# Altium PCB Sandshark 3D R1.2.PcbDoc (part 1 of 3)
Units mil, origin at the board's own origin, x right, y up, seen from the top; angles counter-clockwise.
Board outline 4143.89 x 2810.03 mil, 5 copper layers (Top Layer, Mid-Layer 1, Groun Plane, Power Plane, Bottom Layer), stack 75.73 mil thick; 280 components, 177 nets, 885 pads, 474 vias.
Unrouted connection lines stored in the file: 15.
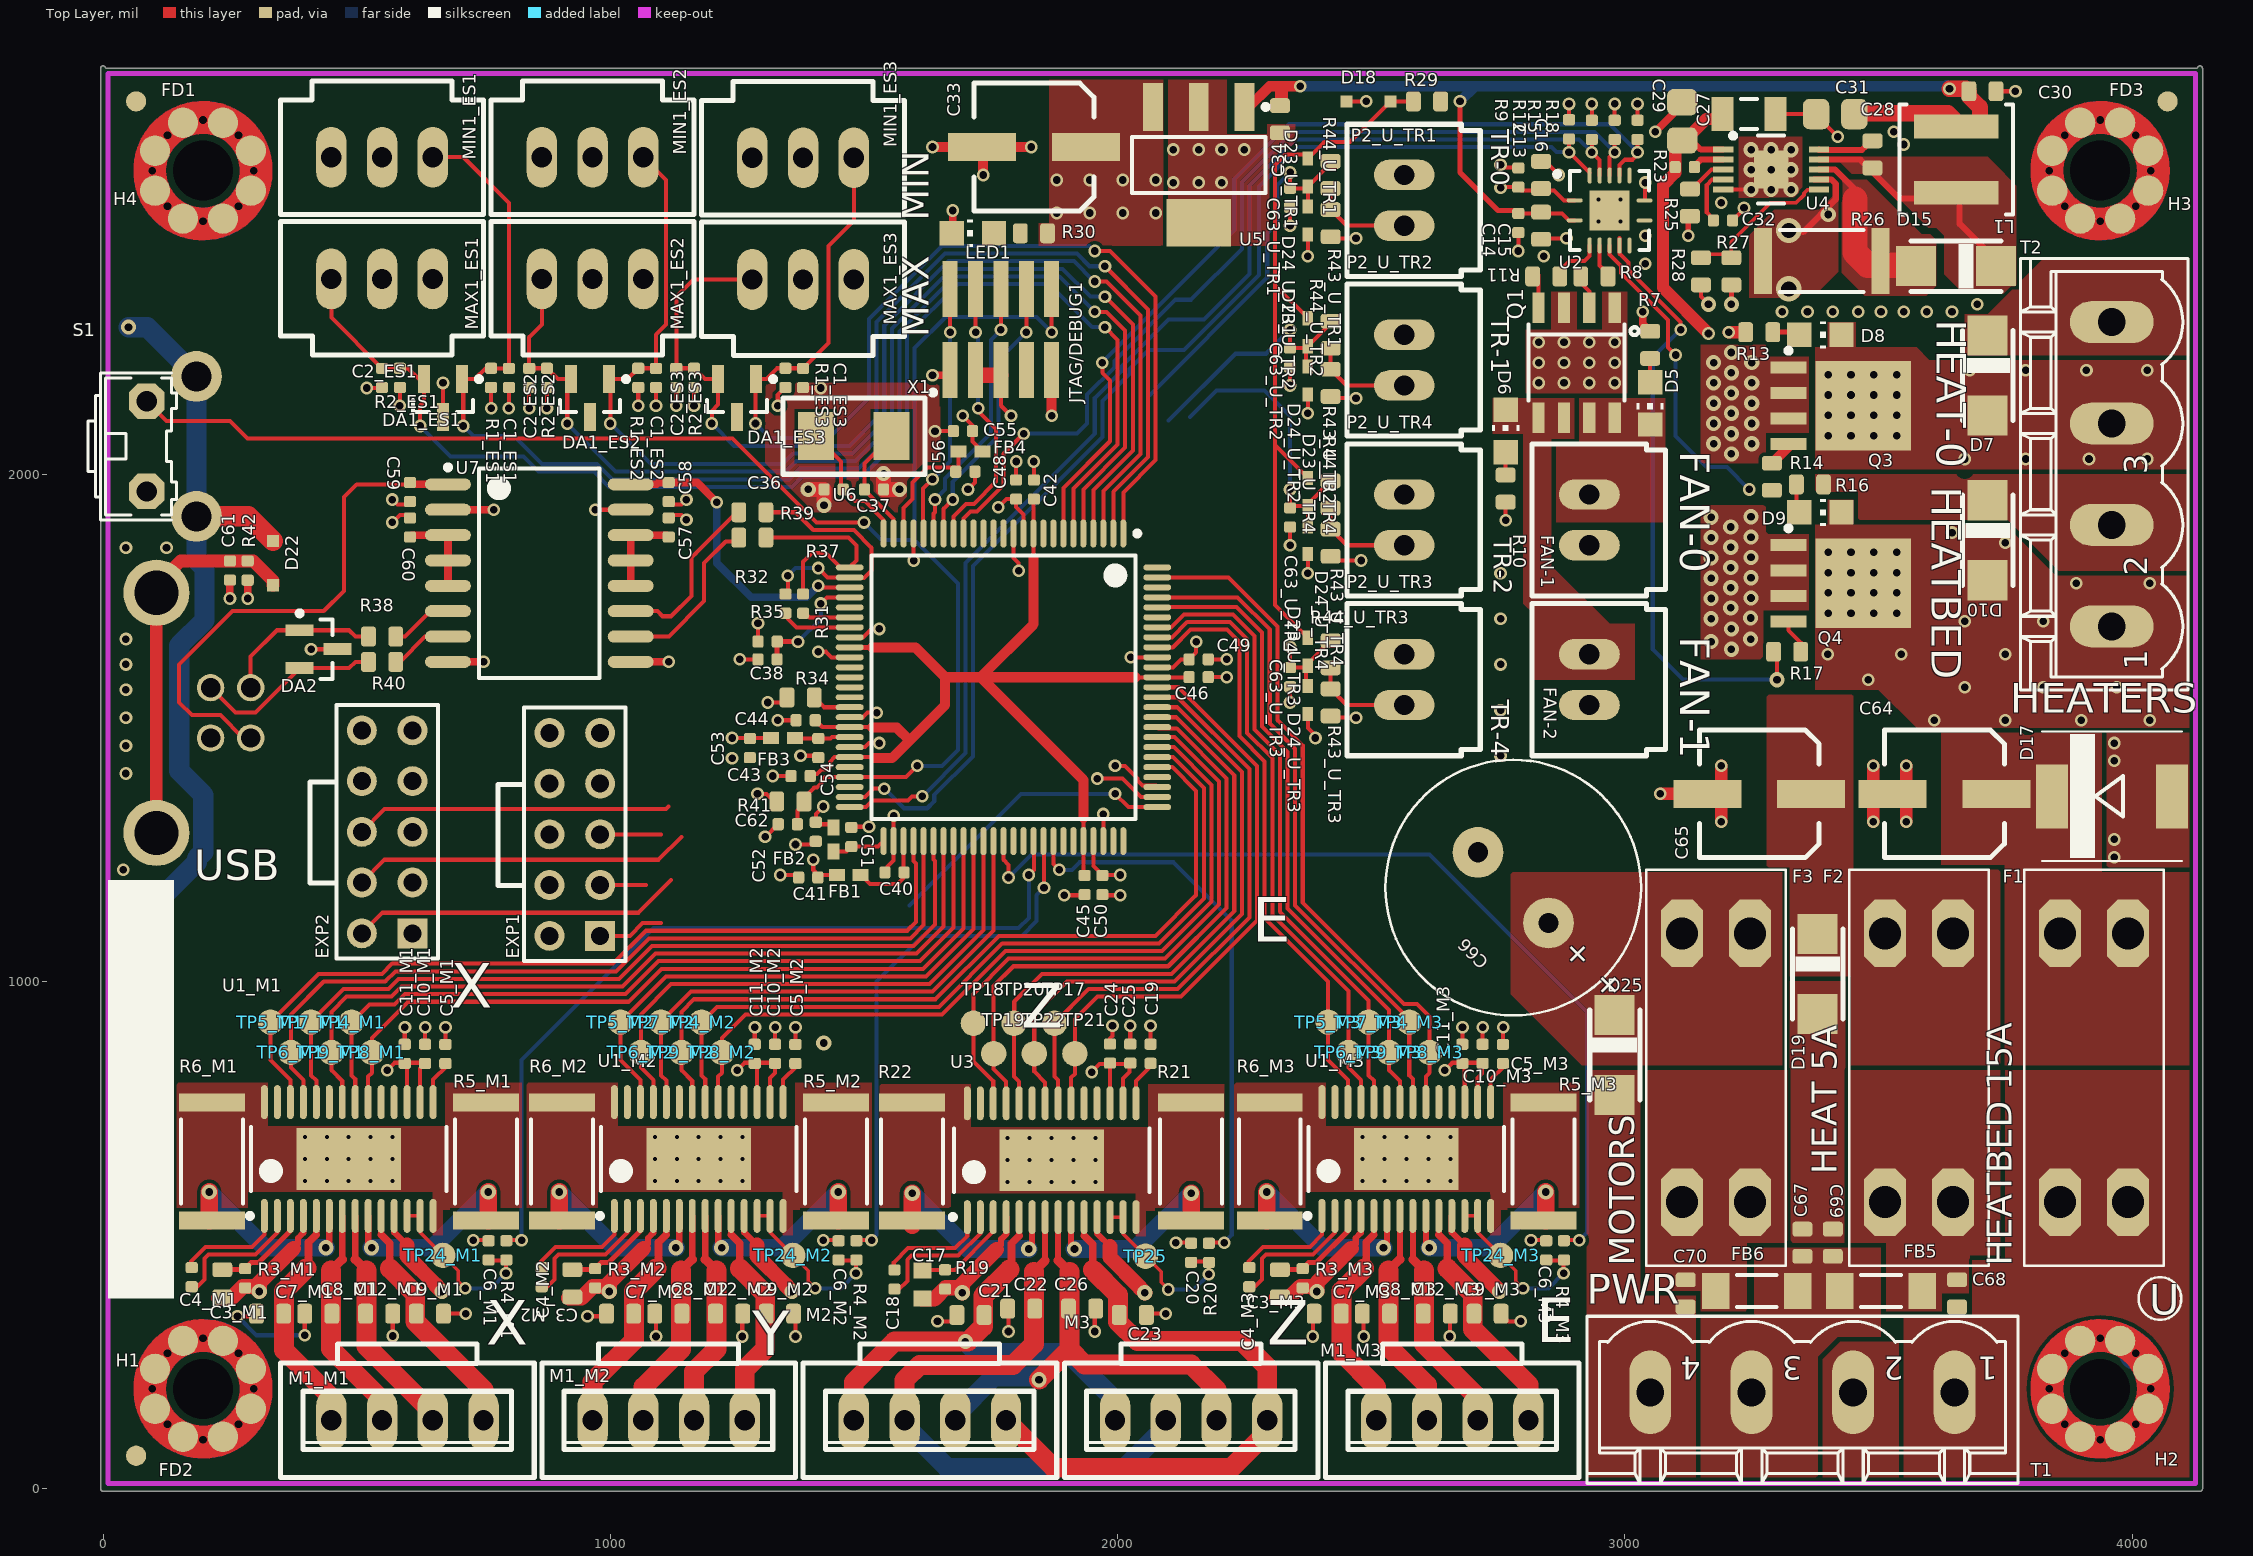
[diagram p0: Top Layer view]
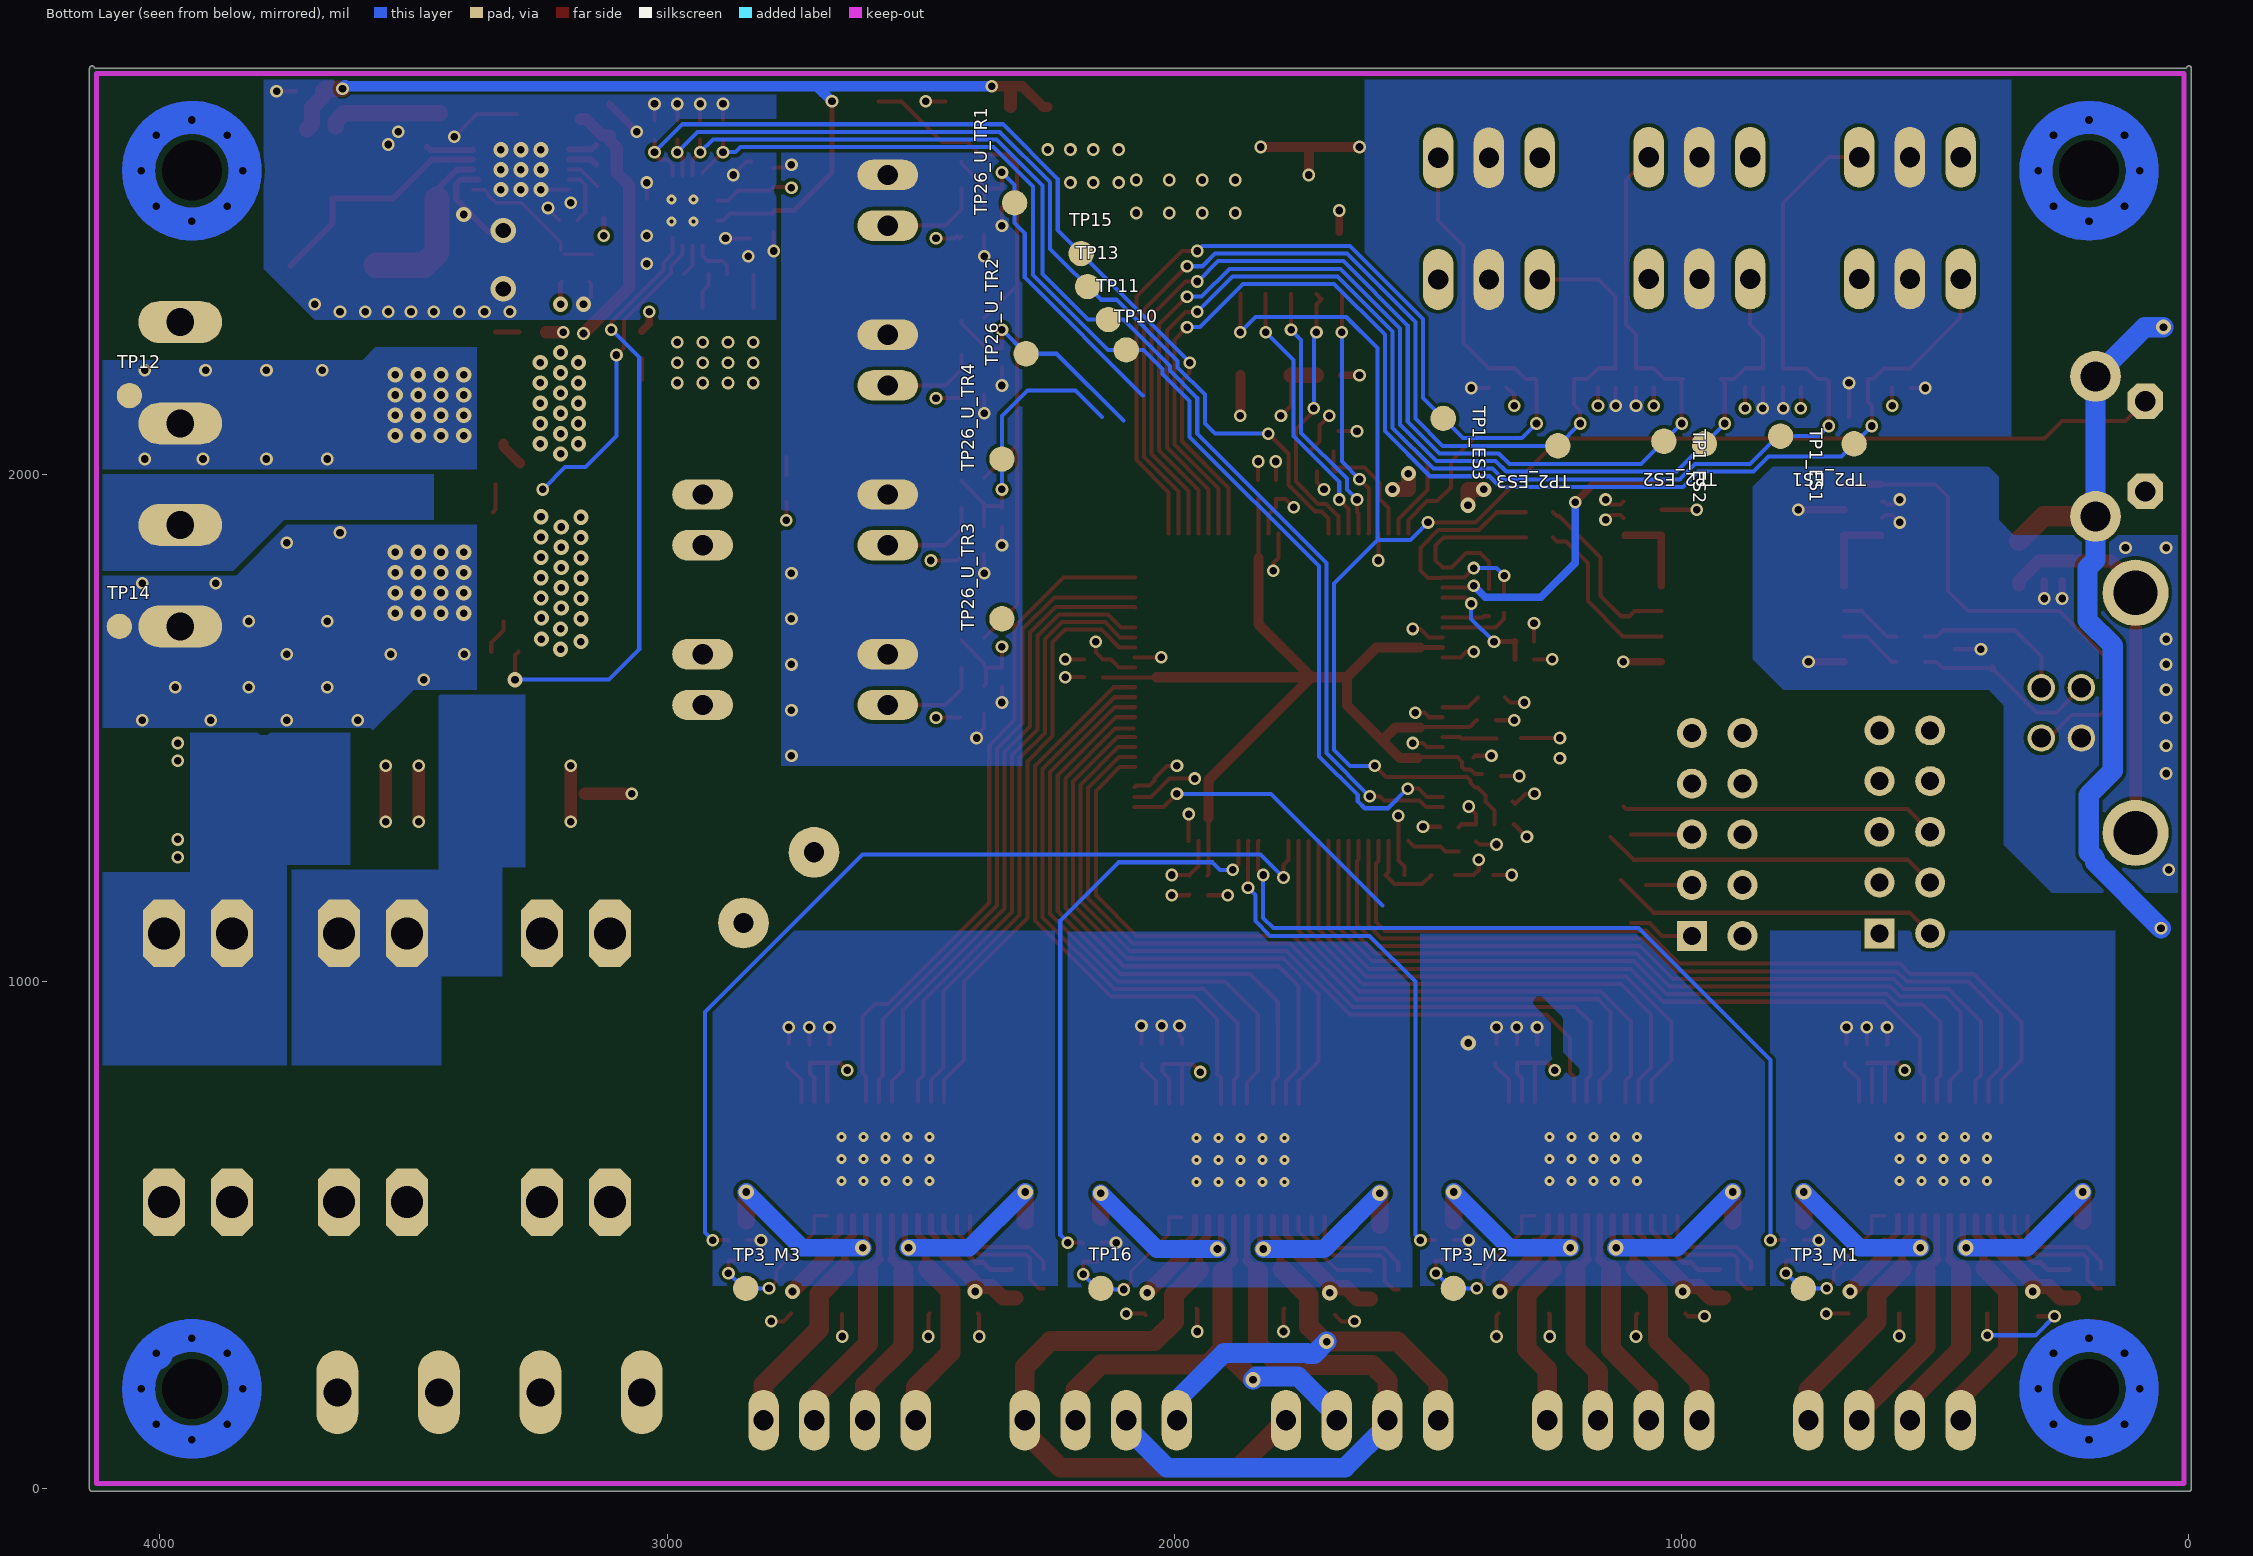
[diagram p1: Bottom Layer view, seen from below]
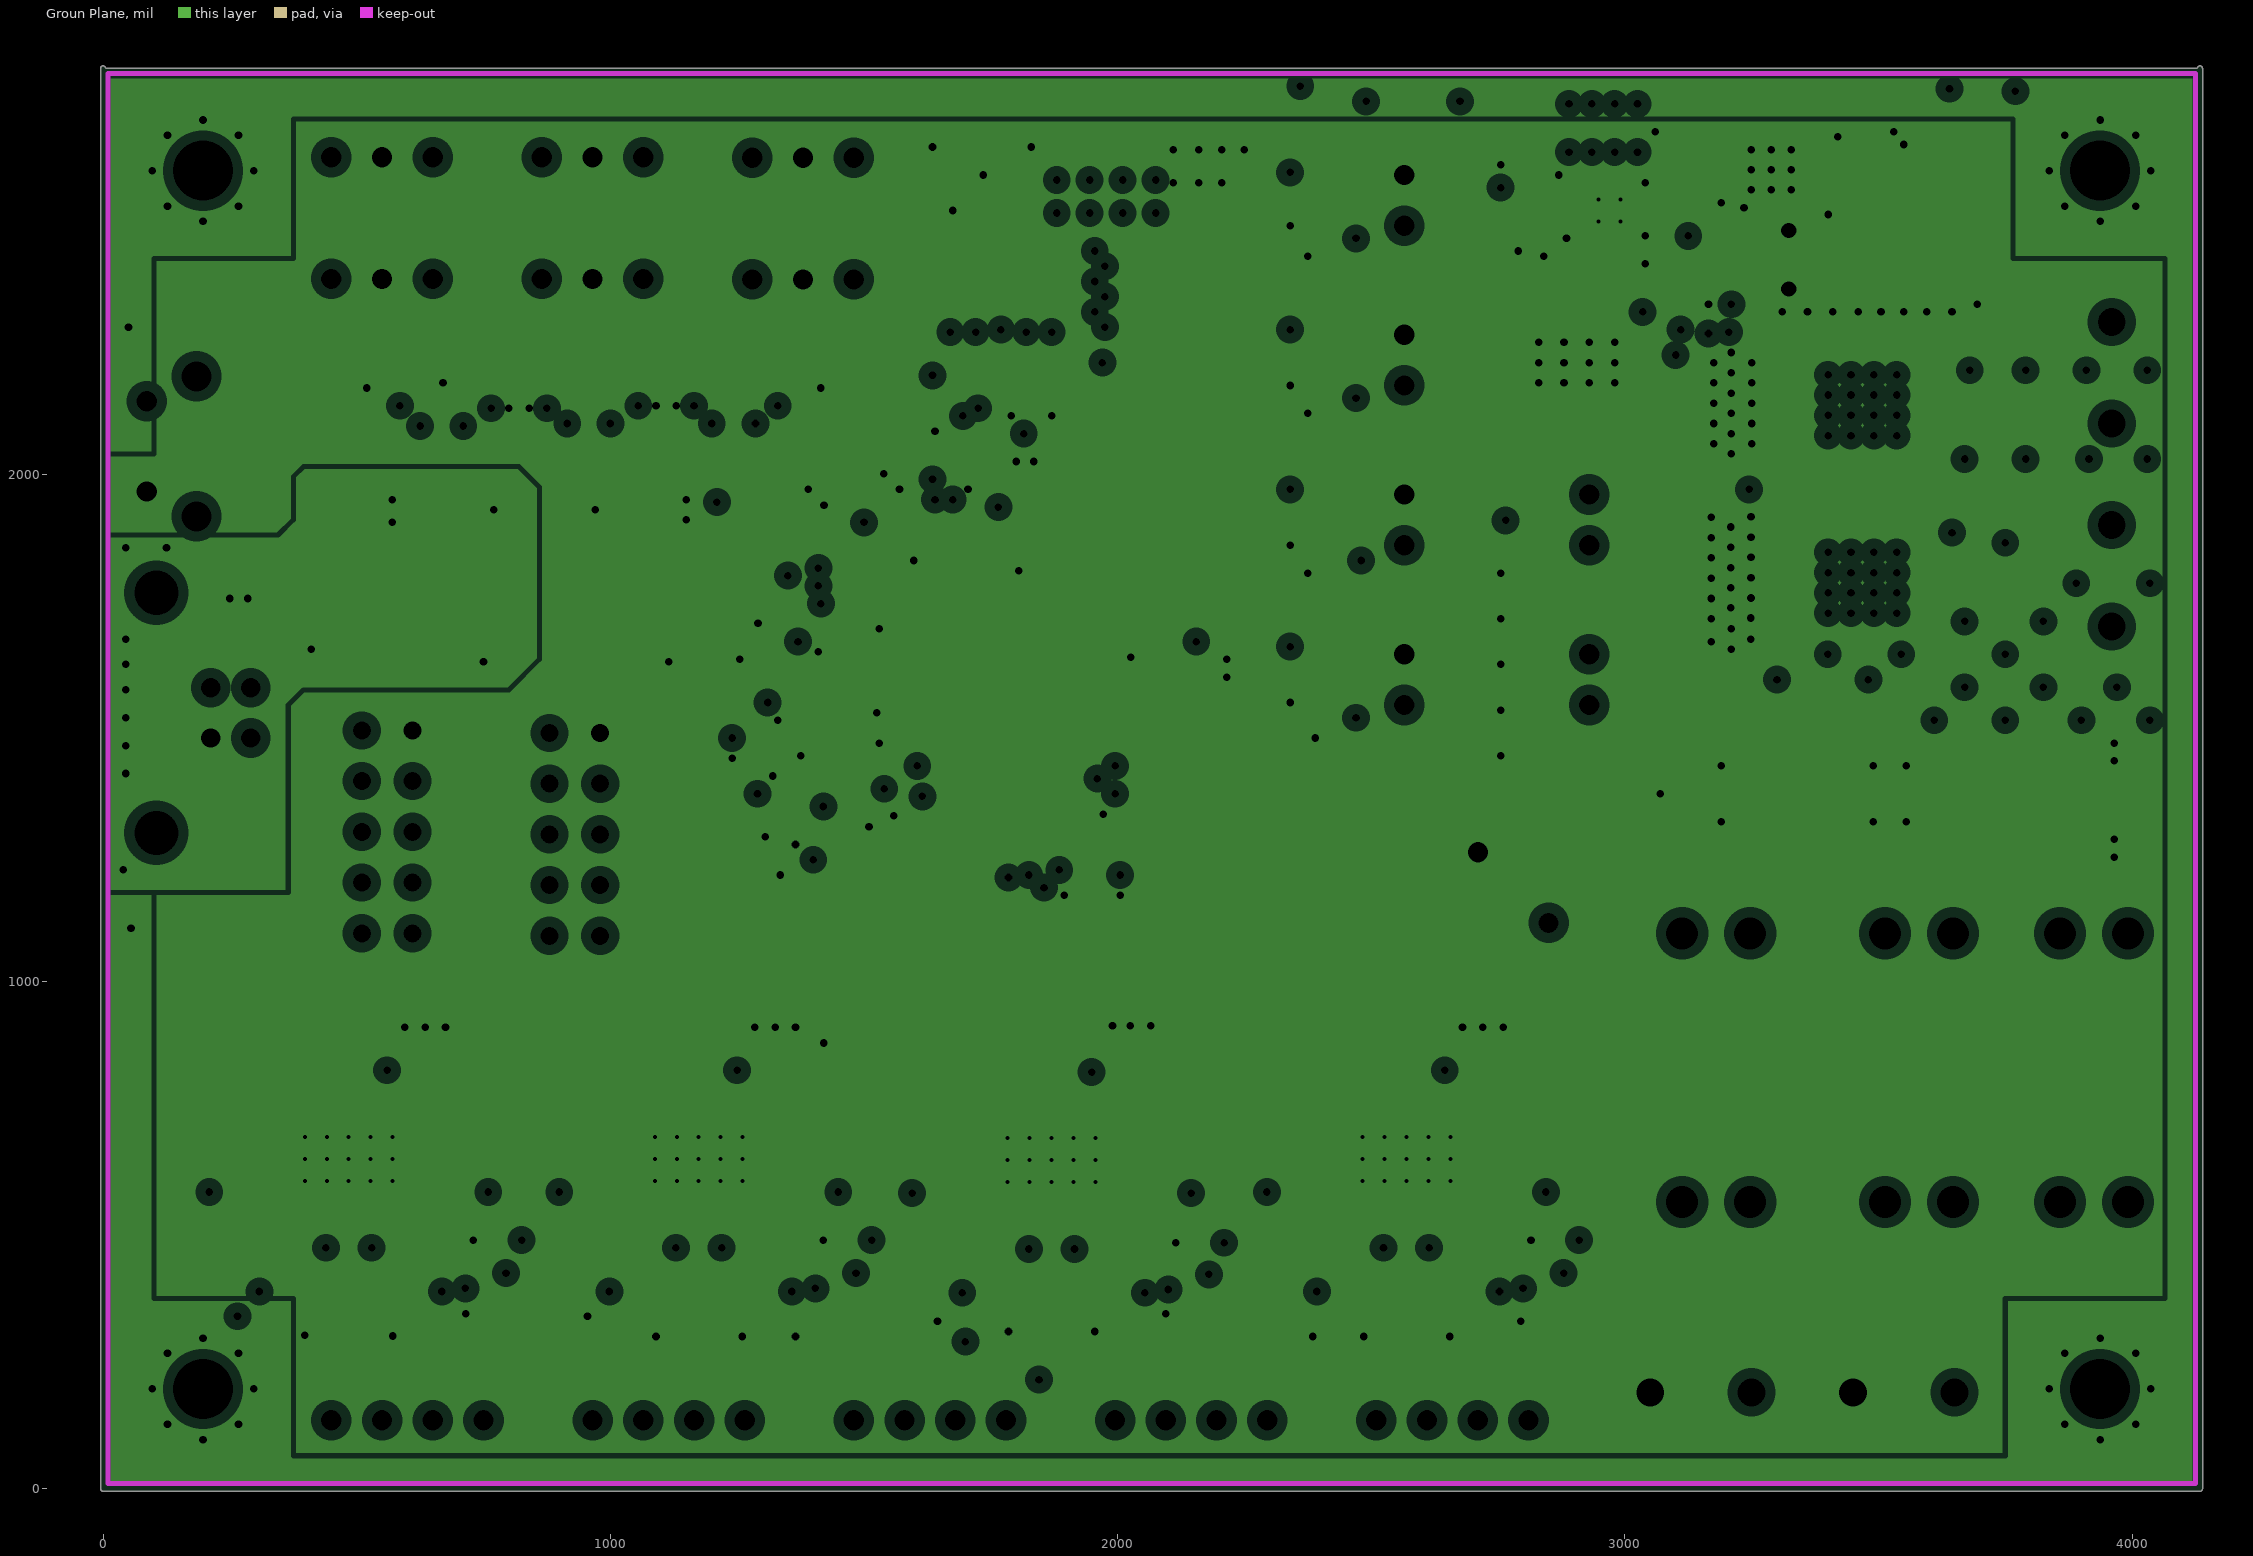
[diagram p2: Groun Plane, clearances drawn from the general rule]
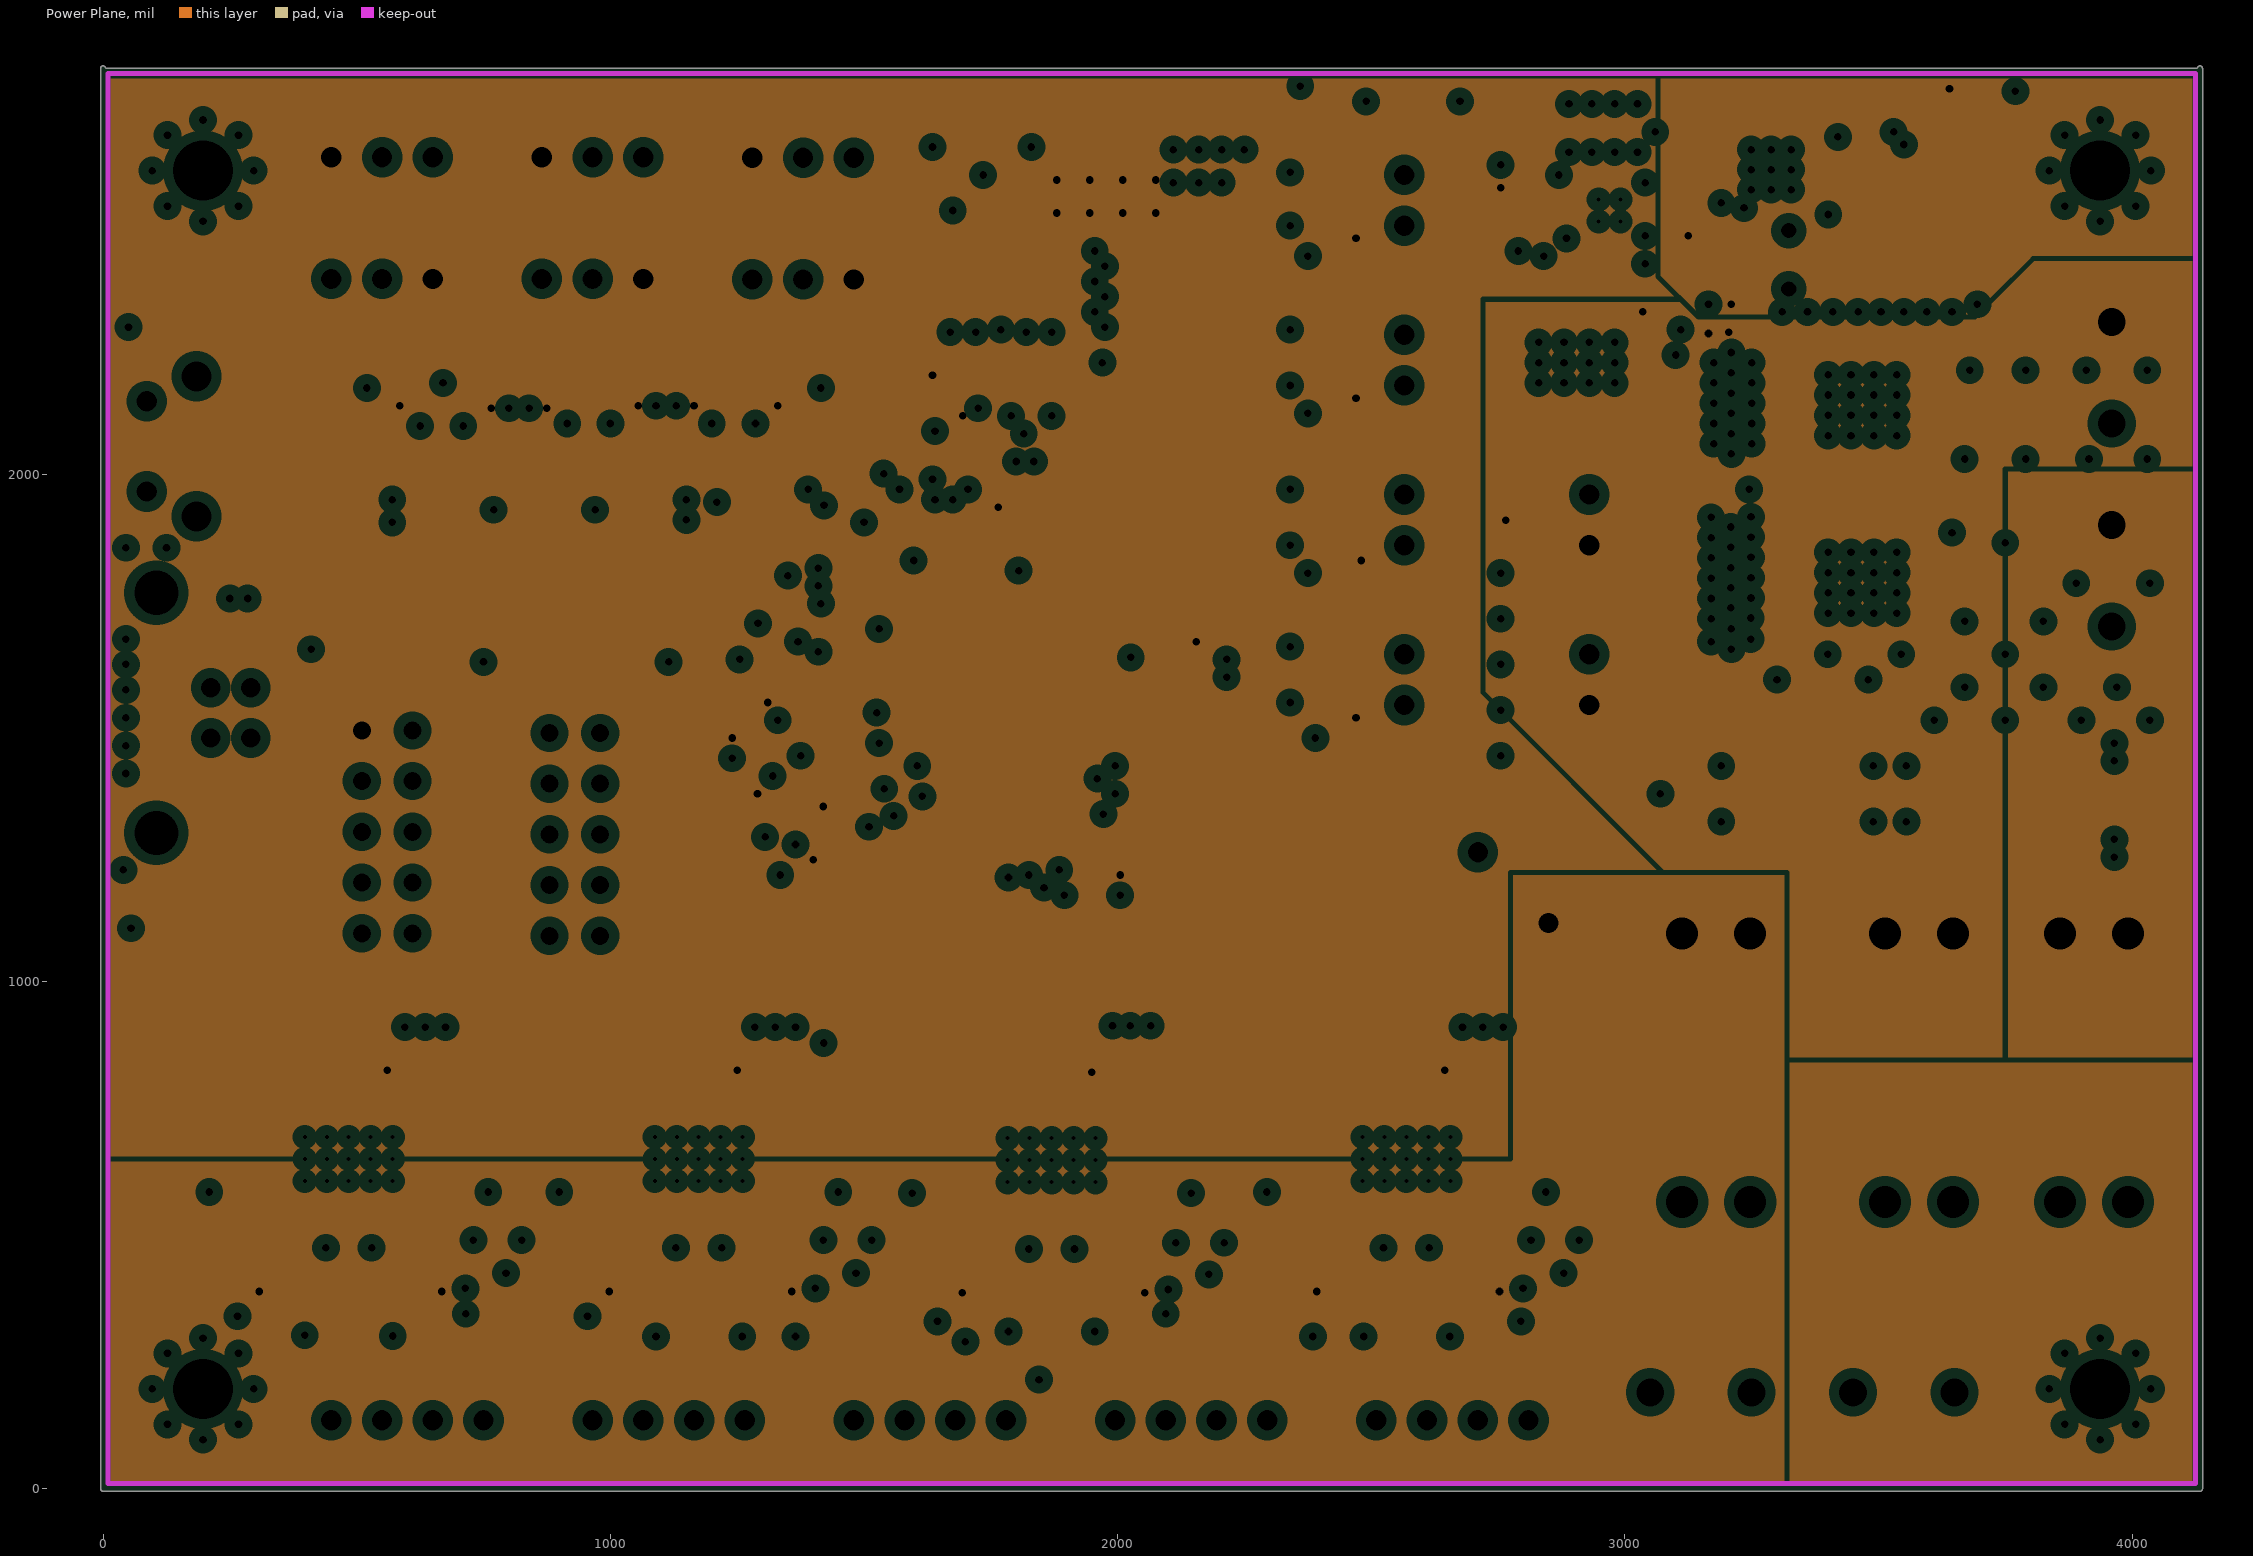
[diagram p3: Power Plane, clearances drawn from the general rule]

## Layer stack, top to bottom
Top Solder: solder mask 0.4, Solder Resist, Dk 3.5
Top Layer: signal copper 2.75
Dielectric1: prepreg 21.654, FR-4, Dk 4.2
Mid-Layer 1: signal copper 1.4
Dielectric4: dielectric 12.6, FR-4, Dk 4.8
Groun Plane: plane copper 1.4, net (Multiple Nets)
Dielectric2: core 10.236, FR-4, Dk 4.2
Power Plane: plane copper 1.4, net (Multiple Nets)
Dielectric3: prepreg 21.54, FR-4, Dk 4.2
Bottom Layer: signal copper 2.75
Bottom Solder: solder mask 0.4, Solder Resist, Dk 3.5

## Board outline
0,-5.01 cw(c0,0) -5.01,0 -5.01,2800 cw(c0,2800) 5.01,2800.29 4128.85,2800.29 cw(c4133.86,2800) 4138.87,2800 4138.87,0 cw(c4133.86,0) 4133.86,-5.01

## Design rules (kind name [scope] priority, off if disabled: settings)
Clearance [All] p1: gap=7
ComponentClearance [All] p1: gap=0 collisioncheckmode=3 verticalgap=10 showdistances=FALSE
DiffPairsRouting [All] p1: maxlimit=10 minlimit=10 mostfreqgap=10 toplayer_minwidth=15 toplayer_maxwidth=15 toplayer_prefwidth=15 midlayer1_minwidth=15 midlayer1_maxwidth=15 midlayer1_prefwidth=15 bottomlayer_minwidth=15 bottomlayer_maxwidth=15 bottomlayer_prefwidth=15 maxuncoupledlength=500
FanoutControl Fanout_SOIC [(InComponent('U8') AND InComponent('U7'))] p3: bgadir=Out bgaviamode=Centered fanoutstyle=Staggered fanoutdirection=Alternating viagrid=1 // Fanout_SOIC (Default Rule)
FanoutControl Fanout_Small [All] p4: bgadir=Out bgaviamode=Centered fanoutstyle=Auto fanoutdirection=Alternating viagrid=1 // Fanout_Small (Default Rule)
HoleSize [All] p1: absolutevalues=TRUE maxlimit=200 minlimit=15 maxpercent=80.000 minpercent=20.000
MinimumSolderMaskSliver [All] p1 off: minsoldermaskwidth=10
PlaneClearance [All] p1: clearance=20
PlaneConnect [All] p1: planeconnectstyle=Direct reliefexpansion=20 reliefentries=4 reliefconductorwidth=10 reliefairgap=10
PolygonConnect [All] p1: connectstyle=Direct reliefconductorwidth=45 reliefentries=4 polygonreliefangle="90 Angle" airgapwidth=10
RoutingLayers [All] p1: top layer_v5=TRUE mid layer 1_v5=FALSE bottom layer_v5=TRUE
RoutingVias [All] p1: holewidth=15 width=25 viastyle="Through Hole" minholewidth=15 minwidth=25 maxholewidth=28 maxwidth=50
SilkToSilkClearance [All] p1 off: silktosilkclearance=10
SilkToSolderMaskClearance SilkscreenOverComponentPads [IsPad] p1 off: minsilkscreentomaskgap=10 clearancetoexposedcopper=TRUE
SolderMaskExpansion [All] p1: expansion=4
UnpouredPolygon [All] p1: allowunpoured=FALSE
Width [All] p1: maxlimit=200 minlimit=7 preferedwidth=8 midlayer1_maxwidth=50 minimp=50.000000 maximp=50.000000 favimp=50.000000
18 further rules are at their usual default settings.

## Classes and differential pairs
component class ES1: C1_ES1 C2_ES1 DA1_ES1 MAX1_ES1 MIN1_ES1 R1_ES1 R2_ES1 TP1_ES1 TP2_ES1
component class ES2: C1_ES2 C2_ES2 DA1_ES2 MAX1_ES2 MIN1_ES2 R1_ES2 R2_ES2 TP1_ES2 TP2_ES2
component class ES3: C1_ES3 C2_ES3 DA1_ES3 MAX1_ES3 MIN1_ES3 R1_ES3 R2_ES3 TP1_ES3 TP2_ES3
component class M1: C3_M1 C4_M1 C5_M1 C6_M1 C7_M1 C8_M1 C9_M1 C10_M1 C11_M1 C12_M1 M1_M1 R3_M1 R4_M1 R5_M1 R6_M1 TP3_M1 TP4_M1 TP5_M1 TP6_M1 TP7_M1 TP8_M1 TP9_M1 TP24_M1 U1_M1
component class M2: C3_M2 C4_M2 C5_M2 C6_M2 C7_M2 C8_M2 C9_M2 C10_M2 C11_M2 C12_M2 M1_M2 R3_M2 R4_M2 R5_M2 R6_M2 TP3_M2 TP4_M2 TP5_M2 TP6_M2 TP7_M2 TP8_M2 TP9_M2 TP24_M2 U1_M2
component class M3: C3_M3 C4_M3 C5_M3 C6_M3 C7_M3 C8_M3 C9_M3 C10_M3 C11_M3 C12_M3 M1_M3 R3_M3 R4_M3 R5_M3 R6_M3 TP3_M3 TP4_M3 TP5_M3 TP6_M3 TP7_M3 TP8_M3 TP9_M3 TP24_M3 U1_M3
component class "Sandshark 3D - MCU - ATSAM3X8C": C36 C37 C38 C40 C41 C42 C43 C44 C45 C46 C48 C49 C50 C51 C52 C53 C54 C55 C56 C57 C58 C59 C60 C61 C62 D22 DA2 EXP1 EXP2 FB1 FB2 FB3 FB4 FD1 FD2 FD3 JTAG/DEBUG1 R31 R32 R34 R35 R37 R38 R39 R40 R41 R42 S1 U6 U7 USB X1
component class "U_MOSFETs and Driver": C13 C14 C15 C16 D5 D6 D7 D8 D9 D10 FAN-1 FAN-2 Q1 Q3 Q4 R7 R8 R9 R10 R11 R12 R13 R14 R15 R16 R17 R18 T2 TP10 TP11 TP12 TP13 TP14 TP15 U2
component class U_MZ: C17 C18 C19 C20 C21 C22 C23 C24 C25 C26 M2 M3 R19 R20 R21 R22 TP16 TP17 TP18 TP19 TP20 TP21 TP22 TP25 U3
component class U_Pwr: C27 C28 C29 C30 C31 C32 C33 C34 C64 C65 C66 C67 C68 C69 C70 D15 D17 D18 D19 D25 F1 F2 F3 FB5 FB6 H1 H2 H3 H4 L1 LED1 R23 R25 R26 R27 R28 R29 R30 T1 U4 U5
net class DIR_BUS[1..3]: DIR_BUS1 DIR_BUS2 DIR_BUS3
net class DRV_RESET_BUS[1..3]: DRV_RESET_BUS1 DRV_RESET_BUS2 DRV_RESET_BUS3
net class EN_BUS[1..3]: EN_BUS1 EN_BUS2 EN_BUS3
net class MAX_ES_BUS[1..3]: MAX_ES_BUS1 MAX_ES_BUS2 MAX_ES_BUS3
net class MIN_ES_BUS[1..3]: MIN_ES_BUS1 MIN_ES_BUS2 MIN_ES_BUS3
net class MOD0E_BUS[1..3]: MOD0E_BUS1 MOD0E_BUS2 MOD0E_BUS3
net class MOD1E_BUS[1..3]: MOD1E_BUS1 MOD1E_BUS2 MOD1E_BUS3
net class MOD2E_BUS[1..3]: MOD2E_BUS1 MOD2E_BUS2 MOD2E_BUS3
net class REF_BUS[1..3]: REF_BUS1 REF_BUS2 REF_BUS3
net class STEP_BUS[1..3]: STEP_BUS1 STEP_BUS2 STEP_BUS3
channel class ES: ES1 ES2 ES3
channel class M: M1 M2 M3
component class U_TR1: C63_U_TR1 D23_U_TR1 D24_U_TR1 P2_U_TR1 R43_U_TR1 R44_U_TR1 TP26_U_TR1
component class U_TR2: C63_U_TR2 D23_U_TR2 D24_U_TR2 P2_U_TR2 R43_U_TR2 R44_U_TR2 TP26_U_TR2
component class U_TR3: C63_U_TR3 D23_U_TR3 D24_U_TR3 P2_U_TR3 R43_U_TR3 R44_U_TR3 TP26_U_TR3
component class U_TR4: C63_U_TR4 D23_U_TR4 D24_U_TR4 P2_U_TR4 R43_U_TR4 R44_U_TR4 TP26_U_TR4
net class AN_BUS[1..4]: AN_BUS1 AN_BUS2 AN_BUS3 AN_BUS4
channel class TR: U_TR1 U_TR2 U_TR3 U_TR4
differential pair R: +R_P -R_N
differential pair UD: +UD_P -UD_N
differential pair UI: +UI_P -UI_N
differential pair UMCU: +UMCU_P -UMCU_N

## Components (designator, comment, footprint, x,y, rotation, side; value= is the part's Value field where it differs from the comment)
C1_ES1 "0402" C0402 800,2190 r270 top (schematic designator C1)
C1_ES2 "0402" C0402 1090,2190 r270 top (schematic designator C1)
C1_ES3 "0402" C0402 1380,2190 r270 top (schematic designator C1)
C2_ES1 "0402" C0402 550,2190 r270 top (schematic designator C2)
C2_ES2 "0402" C0402 840,2190 r270 top (schematic designator C2)
C2_ES3 "0402" C0402 1130,2190 r270 top (schematic designator C2)
C3_M1 "100nF" C0603 235,405 r270 top (schematic designator C3)
C3_M2 "100nF" C0603 925,405 r270 top (schematic designator C3)
C3_M3 "100nF" C0603 2320,405 r270 top (schematic designator C3)
C4_M1 "0402" C0402 174.69,417.2 r270 top (schematic designator C4)
C4_M2 "0402" C0402 864.69,417.2 r270 top (schematic designator C4)
C4_M3 "0402" C0402 2259.69,417.2 r270 top (schematic designator C4)
C5_M1 "0402" C0402 674.69,857.2 r270 top (schematic designator C5)
C5_M2 "0402" C0402 1364.69,857.2 r270 top (schematic designator C5)
C5_M3 "0402" C0402 2759.69,857.2 r270 top (schematic designator C5)
C6_M1 "100nF" C0402 760,470 r270 top (schematic designator C6)
C6_M2 "100nF" C0402 1450,470 r270 top (schematic designator C6)
C6_M3 "100nF" C0402 2845,470 r270 top (schematic designator C6)
C7_M1 "10uF" C0603 329.25,345 r180 top (schematic designator C7)
C7_M2 "10uF" C0603 1019.25,345 r180 top (schematic designator C7)
C7_M3 "10uF" C0603 2414.25,345 r180 top (schematic designator C7)
C8_M1 "10uF" C0603 424.25,345 r180 top (schematic designator C8)
C8_M2 "10uF" C0603 1114.25,345 r180 top (schematic designator C8)
C8_M3 "10uF" C0603 2509.25,345 r180 top (schematic designator C8)
C9_M1 "10uF" C0603 644.25,345 r0 top (schematic designator C9)
C9_M2 "10uF" C0603 1334.25,345 r0 top (schematic designator C9)
C9_M3 "10uF" C0603 2729.25,345 r0 top (schematic designator C9)
C10_M1 "100nF" C0402 634.69,857.2 r90 top (schematic designator C10)
C10_M2 "100nF" C0402 1324.69,857.2 r90 top (schematic designator C10)
C10_M3 "100nF" C0402 2719.69,857.2 r90 top (schematic designator C10)
C11_M1 "100nF" C0402 594.69,857.2 r90 top (schematic designator C11)
C11_M2 "100nF" C0402 1284.69,857.2 r90 top (schematic designator C11)
C11_M3 "100nF" C0402 2679.69,857.2 r90 top (schematic designator C11)
C12_M1 "10uF" C0603 544.25,345 r0 top (schematic designator C12)
C12_M2 "10uF" C0603 1234.25,345 r0 top (schematic designator C12)
C12_M3 "10uF" C0603 2629.25,345 r0 top (schematic designator C12)
C13 "0402" C0402 2790,2585 r270 top
C14 "0402" C0402 2790,2495 r90 top
C15 "0603" C0603 2835,2490 r90 top
C16 "0603" C0603 2835,2590 r270 top
C17 "0603" 1608[0603] 1615,402.64 r90 top
C18 "0402" C0402 1560,412.64 r270 top
C19 "0402" C0402 2065,857.64 r270 top
C20 "100nF" C0402 2145,465 r90 top
C21 "10uF" C0603 1710,342.64 r180 top
C22 "10uF" C0603 1810,355 r180 top
C23 "10uF" C0603 2030,342.64 r0 top
C24 "100nF" C0402 1985,857.64 r90 top
C25 "100nF" C0402 2025,857.64 r90 top
C26 "10uF" C0603 1930,355 r0 top
C27 "4.7uF" C1206 3245,2710 r0 top
C28 "100nF" C0603 3488.31,2630.43 r270 top
C29 "1uF" C0805 3113.31,2695.43 r90 top
C30 "100nF" C0603 3705,2755 r0 top
C31 "10uF" C0805 3415,2710 r180 top
C32 "1uF" C0402 3193.31,2500.43 r0 top
C33 "EEE-1VA101XP" EEE-1VA101XP 1835,2645 r0 top
C34 "0603" C0603 2320,2700 r90 top
C36 "0402" C0402 1440,1970 r0 top
C37 "0402" C0402 1520,1970 r180 top
C38 "22pF" C0402 1310,1635 r180 top
C40 "0402" C0402 1560,1215 r0 top
C41 "0402" C0402 1390,1205 r0 top
C42 "0402" C0402 1835,1970 r270 top
C43 "0402" C0402 1375,1405 r0 top
C44 "0402" C0402 1385,1515 r0 top
C45 "0402" C0402 1935,1190 r90 top
C46 "0402" C0402 2160,1600 r180 top
C48 "0402" C0402 1800,1970 r270 top
C49 "0402" C0402 2160,1635 r180 top
C50 "0402" C0402 1970,1190 r90 top
C51 "0402" C0402 1475,1285 r270 top
C52 "0402" C0402 1405,1295 r90 top
C53 "0402" C0402 1275,1460 r90 top
C54 "0402" C0402 1410,1460 r90 top
C55 "0402" C0402 1695,2085 r0 top
C56 "0402" C0402 1700,2005 r180 top
C57 "100nF" C0402 1115,1895 r90 top
C58 "100nF" C0402 1115,1965 r270 top
C59 "100nF" C0402 605,1965 r270 top
C60 "100nF" C0402 605,1895 r90 top
C61 "0402" C0402 250,1810 r90 top
C62 "100nF" C0402 1350,1310 r180 top
C63_U_TR1 "100nF" C0402 2340,2545 r270 top (schematic designator C63)
C63_U_TR2 "100nF" C0402 2340,2230 r270 top (schematic designator C63)
C63_U_TR3 "100nF" C0402 2340,1600 r270 top (schematic designator C63)
C63_U_TR4 "100nF" C0402 2340,1915 r270 top (schematic designator C63)
C64 "EEE-1VA101XP" EEE-1VA101XP 3630,1370 r0 top
C65 "EEE-1VA101XP" EEE-1VA101XP 3265,1370 r0 top
C66 "470uF" C12,5-5 2780,1185 r135 top
C67 "NP" C0603 3350,485 r90 top
C68 "NP" C0603 3655,385 r270 top
C69 "NP" C0603 3410,485 r90 top
C70 "NP" C0603 3120,385 r270 top
D5 "5988140107F" LED2012120 3050,2140 r270 top
D6 "5988140107F" LED2012120 2765,2085 r90 top
D7 "SK310A-TP" SMA-SM 3715,2195 r270 top
D8 "5988140107F" LED2012120 3385,2275 r0 top
D9 "5988140107F" LED2012120 3385,1925 r0 top
D10 "SK310A-TP" SMA-SM 3715,1870 r270 top
D15 "SK310A-TP" SMA-SM 3653.31,2410.43 r180 top
D17 "S3A-13-F" DO-214AB 3960,1365 r0 top
D18 "SZMM3Z4V7T1G" SOD323-R 2495,2735 r180 top
D19 "SK310A" SMA-SM 3380,1015 r270 top
D22 "RSB39VTE-17" SOD323-R 335,1825 r270 top
D23_U_TR1 "1N4148WT" SOD523 2375,2595 r270 top (schematic designator D23)
D23_U_TR2 "1N4148WT" SOD523 2375,2280 r270 top (schematic designator D23)
D23_U_TR3 "1N4148WT" SOD523 2375,1650 r270 top (schematic designator D23)
D23_U_TR4 "1N4148WT" SOD523 2375,1965 r270 top (schematic designator D23)
D24_U_TR1 "1N4148WT" SOD523 2375,2500 r270 top (schematic designator D24)
D24_U_TR2 "1N4148WT" SOD523 2375,2185 r270 top (schematic designator D24)
D24_U_TR3 "1N4148WT" SOD523 2375,1555 r270 top (schematic designator D24)
D24_U_TR4 "1N4148WT" SOD523 2375,1870 r270 top (schematic designator D24)
D25 "SK310A" SMA-SM 2980,855 r270 top
DA1_ES1 "PESDxL2BT" SOT95P230X110-3N 670,2150 r270 top (schematic designator DA1)
DA1_ES2 "PESDxL2BT" SOT95P230X110-3N 960,2150 r270 top (schematic designator DA1)
DA1_ES3 "PESDxL2BT" SOT95P230X110-3N 1250,2150 r270 top (schematic designator DA1)
DA2 "PESDxL2BT" SOT95P230X110-3N 425,1655 r0 top
EXP1 "Header 5X2" HDR2X5 980,1090 r90 top
EXP2 "Header 5X2" HDR2X5 610,1095 r90 top
F1 "3557-2" 3557 3925,830 r90 top
F2 "3557-2" 3557 3580,830 r90 top
F3 "3557-2" 3557 3180,830 r90 top
FAN-1 "Molex 70543-02" 70543-02 2930,1910 r90 top
FAN-2 "Molex 70543-02" 70543-02 2930,1595 r90 top
FB1 "BLM15HG601SN1D" BLM18PG121SN1D 1470,1210 r180 top
FB2 "BLM15HG601SN1D" BLM18PG121SN1D 1440,1280 r90 top
FB3 "BLM15HG601SN1D" BLM18PG121SN1D 1340,1480 r0 top
FB4 "BLM15HG601SN1D" BLM18PG121SN1D 1710,2045 r180 top
FB5 "BLM41PG600SN1L" L1806 3505,390 r0 top
FB6 "BLM41PG600SN1L" L1806 3260,390 r180 top
FD1 "FIDUCIAL" FIDUCIAL-1X2 65,2735 r0 top
FD2 "FIDUCIAL" FIDUCIAL-1X2 65,65 r0 top
FD3 "FIDUCIAL" FIDUCIAL-1X2 4070,2735 r0 top
H1 "Hole" Wave_hole_3x7-singleSided#1 196.85,196.85 r0 top
H2 "Hole" Wave_hole_3x7-singleSided#1 3937.01,196.85 r0 top
H3 "Hole" Wave_hole_3x7-singleSided#1 3937.01,2598.43 r0 top
H4 "Hole" Wave_hole_3x7-singleSided#2 196.85,2598.43 r0 top
JTAG/DEBUG1 "FTSH-105-XX-X-DV" FTSH-105-XX-X-DV 1770,2285 r180 top
L1 "XAL5050-153MEB" XAL50xx-153 3653.31,2620.43 r90 top
LED1 "5988170107F" LED2012120 1715,2475 r180 top
M1_M1 "Molex 0705430003" 4POL254 600,135 r180 top (schematic designator M1)
M1_M2 "Molex 0705430003" 4POL254 1115,135 r180 top (schematic designator M1)
M1_M3 "Molex 0705430003" 4POL254 2660,135 r180 top (schematic designator M1)
M2 "Molex 0705430003" 4POL254 1630,135 r180 top
M3 "Molex 0705430003" 4POL254 2145,135 r180 top
MAX1_ES1 "Molex 70543-03" 70543-03 550,2385 r0 top (schematic designator MAX1)
MAX1_ES2 "Molex 70543-03" 70543-03 965,2385 r0 top (schematic designator MAX1)
MAX1_ES3 "Molex 70543-03" 70543-03 1380,2384 r0 top (schematic designator MAX1)
MIN1_ES1 "Molex 70543-03" 70543-03 550,2625 r180 top (schematic designator MIN1)
MIN1_ES2 "Molex 70543-03" 70543-03 965,2625 r180 top (schematic designator MIN1)
MIN1_ES3 "Molex 70543-03" 70543-03 1380,2624 r180 top (schematic designator MIN1)
P2_U_TR1 "Molex 70543-02" 70543-02 2565,2540 r90 top (schematic designator P2)
P2_U_TR2 "Molex 70543-02" 70543-02 2565,2225 r90 top (schematic designator P2)
P2_U_TR3 "Molex 70543-02" 70543-02 2565,1595 r90 top (schematic designator P2)
P2_U_TR4 "Molex 70543-02" 70543-02 2565,1910 r90 top (schematic designator P2)
Q1 "NCV8402AD" NCV8402AD-SOIC8 2905,2220 r180 top (schematic designator Q8)
Q3 "PSMN7R0-60YS" PSMN7R0-60YS 3425,2135 r0 top
Q4 "PSMN7R0-60YS" PSMN7R0-60YS 3425,1785 r0 top
R1_ES1 "2.7K" R0402 765,2190 r270 top (schematic designator R1)
R1_ES2 "2.7K" R0402 1055,2190 r270 top (schematic designator R1)
R1_ES3 "2.7K" R0402 1345,2190 r270 top (schematic designator R1)
R2_ES1 "2.7K" R0402 585,2190 r270 top (schematic designator R2)
R2_ES2 "2.7K" R0402 875,2190 r270 top (schematic designator R2)
R2_ES3 "2.7K" R0402 1165,2190 r270 top (schematic designator R2)
R3_M1 "1M" R0402 280,415 r270 top (schematic designator R3)
R3_M2 "1M" R0402 970,415 r270 top (schematic designator R3)
R3_M3 "1M" R0402 2365,415 r270 top (schematic designator R3)
R4_M1 "2.7K" R0402 795,470 r270 top (schematic designator R4)
R4_M2 "2.7K" R0402 1485,470 r270 top (schematic designator R4)
R4_M3 "2.7K" R0402 2880,470 r270 top (schematic designator R4)
R5_M1 "2512" 2512R-0.55 755,645 r270 top (schematic designator R5)
R5_M2 "2512" 2512R-0.55 1445,645 r270 top (schematic designator R5)
R5_M3 "2512" 2512R-0.55 2840,645 r270 top (schematic designator R5)
R6_M1 "2512" 2512R-0.55 215,645 r270 top (schematic designator R6)
R6_M2 "2512" 2512R-0.55 905,645 r270 top (schematic designator R6)
R6_M3 "2512" 2512R-0.55 2300,645 r270 top (schematic designator R6)
R7 "1.8K" R0603 3050,2255 r90 top
R8 "10r" R0603 2940,2390 r180 top
R9 "100K" R0402 2890,2680 r270 top
R10 "1.8K" R0603 2765,1971.77 r270 top
R11 "10r" R0603 2845,2390 r180 top
R12 "100K" R0402 2935,2679 r270 top
R13 "1.8K" R0603 3265,2280 r180 top
R14 "10r" R0603 3290,1995 r90 top
R15 "100K" R0402 2980,2679 r270 top
R16 "1.8K" R0603 3365,1980 r0 top
R17 "10r" R0603 3320,1650 r0 top
R18 "100K" R0402 3025,2679 r270 top
R19 "1M" R0402 1660,412.64 r270 top
R20 "2.7K" R0402 2180,465 r270 top
R21 "2512" 2512R-0.55 2145,644.84 r270 top
R22 "2512" 2512R-0.55 1595,644.84 r270 top
R23 "200K" R0402 3118.31,2605.43 r180 top
R25 "10K" R0603 3128.31,2535.43 r270 top
R26 "0.6r" 2512R-0.55 3388.31,2420.43 r0 top
R27 "10K" R0603 3210,2400 r90 top
R28 "10K" R0603 3150,2400 r270 top
R29 "10K" R0603 2610,2735 r0 top
R30 "1K" R0603 1835,2475 r0 top
R31 "39r" R0402 1380,1745 r270 top
R32 "39r" R0402 1345,1745 r270 top
R34 "10K" R0603 1375,1560 r0 top
R35 "6.8K" R0402 1310,1670 r0 top
R37 "24r" R0603 1280,1875 r180 top
R38 "24r" R0603 550,1680 r180 top
R39 "24r" R0603 1280,1925 r180 top
R40 "24r" R0603 550,1630 r180 top
R41 "10K" R0603 1355,1355 r180 top
R42 "1M" R0402 285,1810 r90 top
R43_U_TR1 "4.7K" R0603 2420,2495 r270 top (schematic designator R43)
R43_U_TR2 "4.7K" R0603 2420,2180 r270 top (schematic designator R43)
R43_U_TR3 "4.7K" R0603 2420,1550 r270 top (schematic designator R43)
R43_U_TR4 "4.7K" R0603 2420,1865 r270 top (schematic designator R43)
R44_U_TR1 "4.7K" R0603 2420,2590 r270 top (schematic designator R44)
R44_U_TR2 "4.7K" R0603 2420,2275 r270 top (schematic designator R44)
R44_U_TR3 "4.7K" R0603 2420,1645 r270 top (schematic designator R44)
R44_U_TR4 "4.7K" R0603 2420,1960 r270 top (schematic designator R44)
S1 "1571610-2" B3F-31XX 135,2055 r270 top
T1 "con-phoenix-508 - 4" MSTBV4 3350,190 r180 top
T2 "con-phoenix-508 - 4" MSTBV4 3960,2000 r90 top
TP1_ES1 "TP4" TP-2 805,2075 r180 bottom (schematic designator TP1)
TP1_ES2 "TP4" TP-2 1035,2065 r180 bottom (schematic designator TP1)
TP1_ES3 "TP4" TP-2 1470,2110 r180 bottom (schematic designator TP1)
TP2_ES1 "TP4" TP-2 660,2060 r270 bottom (schematic designator TP2)
TP2_ES2 "TP4" TP-2 955,2060 r270 bottom (schematic designator TP2)
TP2_ES3 "TP4" TP-2 1244,2056 r270 bottom (schematic designator TP2)
TP3_M1 "TP4" TP-2 760,395 r90 bottom (schematic designator TP3)
TP3_M2 "TP4" TP-2 1450,395 r90 bottom (schematic designator TP3)
TP3_M3 "TP4" TP-2 2845,395 r90 bottom (schematic designator TP3)
TP4_M1 "TP4" TP-2 490,920 r180 top (schematic designator TP4)
TP4_M2 "TP4" TP-2 1180,920 r90 top (schematic designator TP4)
TP4_M3 "TP4" TP-2 2575,920 r90 top (schematic designator TP4)
TP5_M1 "TP4" TP-2 330,920 r180 top (schematic designator TP5)
TP5_M2 "TP4" TP-2 1020,920 r90 top (schematic designator TP5)
TP5_M3 "TP4" TP-2 2415,920 r90 top (schematic designator TP5)
TP6_M1 "TP4" TP-2 370,860 r180 top (schematic designator TP6)
TP6_M2 "TP4" TP-2 1060,860 r90 top (schematic designator TP6)
TP6_M3 "TP4" TP-2 2455,860 r90 top (schematic designator TP6)
TP7_M1 "TP4" TP-2 410,920 r180 top (schematic designator TP7)
TP7_M2 "TP4" TP-2 1100,920 r90 top (schematic designator TP7)
TP7_M3 "TP4" TP-2 2495,920 r90 top (schematic designator TP7)
TP8_M1 "TP4" TP-2 530,860 r180 top (schematic designator TP8)
TP8_M2 "TP4" TP-2 1220,860 r90 top (schematic designator TP8)
TP8_M3 "TP4" TP-2 2615,860 r90 top (schematic designator TP8)
TP9_M1 "TP4" TP-2 450,860 r180 top (schematic designator TP9)
TP9_M2 "TP4" TP-2 1140,860 r90 top (schematic designator TP9)
TP9_M3 "TP4" TP-2 2535,860 r90 top (schematic designator TP9)
TP10 "TP4" TP-2 2095,2245 r90 bottom
TP11 "TP4" TP-2 2130,2305 r90 bottom
TP12 "TP4" TP-2 4060,2155 r90 bottom
TP13 "TP4" TP-2 2170.91,2370 r90 bottom
TP14 "TP4" TP-2 4080,1700 r90 bottom
TP15 "TP4" TP-2 2183.79,2435 r90 bottom
TP16 "TP4" TP-2 2145,395 r90 bottom
TP17 "TP4" TP-2 1875.75,917.64 r90 top
TP18 "TP4" TP-2 1715.75,917.64 r90 top
TP19 "TP4" TP-2 1755.75,857.64 r90 top
TP20 "TP4" TP-2 1795.75,917.64 r90 top
TP21 "TP4" TP-2 1915.75,857.64 r90 top
TP22 "TP4" TP-2 1835.75,857.64 r90 top
TP24_M1 "TP4" TP-2 670,460 r90 top (schematic designator TP24)
TP24_M2 "TP4" TP-2 1360,460 r90 top (schematic designator TP24)
TP24_M3 "TP4" TP-2 2755,460 r90 top (schematic designator TP24)
TP25 "TP4" TP-2 2055,458.39 r90 top
TP26_U_TR1 "TP4" TP-2 2315,2535 r0 bottom (schematic designator TP26)
TP26_U_TR2 "TP4" TP-2 2292.5,2237.5 r0 bottom (schematic designator TP26)
TP26_U_TR3 "TP4" TP-2 2340,1715 r0 bottom (schematic designator TP26)
TP26_U_TR4 "TP4" TP-2 2340,2030 r0 bottom (schematic designator TP26)
U1_M1 "DRV8825" DRV8825PWPR 484.25,650 r90 top (schematic designator U1)
U1_M2 "DRV8825" DRV8825PWPR 1174.25,650 r90 top (schematic designator U1)
U1_M3 "DRV8825" DRV8825PWPR 2569.25,650 r90 top (schematic designator U1)
U2 "TXS0104E" "RGY  (S-PVQFN-N14)" 2970,2520 r0 top
U3 "DRV8825" DRV8825PWPR 1870,647.64 r90 top
U4 "LM25011MY/NOPB" VSSOP10 3288.31,2600.43 r0 top
U5 "MIC5209-3.3YS" SOT230P700X190-4N 2160,2610 r270 top
U6 "Atmel ATSAM3X8CA-AU" "ATSAM3X8CA-AU TQFP100" 1775,1580 r270 top locked
U7 "ADuM4160" ADUM4160BRWZ-RL 860,1805 r0 top
USB "USB-B" PN61729 105,1530 r270 top
X1 "445C35A12M00000" 445C35A12M00000 1405,2075 r0 top

## Footprints (in the part's own frame and the unit in brackets; to place one, negate y for a bottom-side part, rotate by r counter-clockwise, add the part's x,y. Pads: shape width x height; smd on the part's side, far side on the other; paste and mask are expansions set on the pad)
4POL254 [mil]
  oval 60x120 hole 40: 1(-150,0) 2(-50,0) 3(50,0) 4(150,0)
  silkscreen extent -250,-150 250,113, body extent -250,-150 250,113, height 454
445C35A12M00000 [mm] "Crystal Oscillator"
  rect 1.8x2.4 smd: 1(0,0) 2(3.8,0)
  silkscreen extent -1.65,-1.91 5.46,1.91, body extent -1.27,-1.52 5.08,1.52, height 1
1608[0603] [mm] "Chip Capacitor, Body 1.6x0.8mm, IPC High Density"
  rect 0.8x0.9 smd: 1(-0.7,0) 2(0.7,0)
  body extent -0.87,-0.48 0.87,0.48, height 1.3
2512R-0.55 [mm] "2512 Resistor 6.35mm x 3.2mm x 0.55mm"
  rect 0.9x3.3 smd: 1(-2.95,0) 2(2.95,0)
  silkscreen extent -2.1,-1.55 2.1,1.55, body extent -3.22,-1.68 3.22,1.68, height 0.65
3557 [mil] "3557"
  oct 133x83 hole 63: 1(-265,-67) 1(-265,67) 2(265,-67) 2(265,67)
  silkscreen extent -390,-138 390,138, body extent -392,-140 392,140, height 709
70543-02 [mil]
  oval 60x120 hole 40: 1(-50,0) 2(50,0)
  silkscreen extent -150,-150 150,113, body extent -150,-150 150,113, height 450
70543-03 [mil]
  oval 60x120 hole 40: 1(-100,0) 2(0,0) 3(100,0)
  silkscreen extent -200,-150 200,113, body extent -200,-150 200,113, height 450
ADUM4160BRWZ-RL [mm] "SOIC ADI iCouopler Package BRWZ-RL"
  oval 2.3x0.6 smd: 1(-4.575,4.445) 2(-4.575,3.175) 3(-4.575,1.905) 4(-4.575,0.635) 5(-4.575,-0.635) 6(-4.575,-1.905) 7(-4.575,-3.175) 8(-4.575,-4.445) 9(4.575,-4.445) 10(4.575,-3.175) 11(4.575,-1.905) 12(4.575,-0.635) 13(4.575,0.635) 14(4.575,1.905) 15(4.575,3.175) 16(4.575,4.445)
  silkscreen extent -4.7,-5.25 3.03,5.42, body extent -3.8,-5.25 3.8,5.25, height 2.65
"ATSAM3X8CA-AU TQFP100" [mm] "TSQFP, 100-Leads, Body 14.00x14.00mm, Pitch 0.50mm, IPC Medium Density"
  oval 1.4x0.3 smd: 1(-7.7,6) 2(-7.7,5.5) 3(-7.7,5) 4(-7.7,4.5) 5(-7.7,4) 6(-7.7,3.5) 7(-7.7,3) 8(-7.7,2.5) 9(-7.7,2) 10(-7.7,1.5) 11(-7.7,1) 12(-7.7,0.5) 13(-7.7,0) 14(-7.7,-0.5) 15(-7.7,-1) 16(-7.7,-1.5) 17(-7.7,-2) 18(-7.7,-2.5) 19(-7.7,-3) 20(-7.7,-3.5) 21(-7.7,-4) 22(-7.7,-4.5) 23(-7.7,-5) 24(-7.7,-5.5) 25(-7.7,-6) 51(7.7,-6) 52(7.7,-5.5) 53(7.7,-5) 54(7.7,-4.5) 55(7.7,-4) 56(7.7,-3.5) 57(7.7,-3) 58(7.7,-2.5) 59(7.7,-2) 60(7.7,-1.5) 61(7.7,-1) 62(7.7,-0.5) 63(7.7,0) 64(7.7,0.5) 65(7.7,1) 66(7.7,1.5) 67(7.7,2) 68(7.7,2.5) 69(7.7,3) 70(7.7,3.5) 71(7.7,4) 72(7.7,4.5) 73(7.7,5) 74(7.7,5.5) 75(7.7,6)
  oval 0.3x1.4 smd: 26(-6,-7.7) 27(-5.5,-7.7) 28(-5,-7.7) 29(-4.5,-7.7) 30(-4,-7.7) 31(-3.5,-7.7) 32(-3,-7.7) 33(-2.5,-7.7) 34(-2,-7.7) 35(-1.5,-7.7) 36(-1,-7.7) 37(-0.5,-7.7) 38(0,-7.7) 39(0.5,-7.7) 40(1,-7.7) 41(1.5,-7.7) 42(2,-7.7) 43(2.5,-7.7) 44(3,-7.7) 45(3.5,-7.7) 46(4,-7.7) 47(4.5,-7.7) 48(5,-7.7) 49(5.5,-7.7) 50(6,-7.7) 76(6,7.7) 77(5.5,7.7) 78(5,7.7) 79(4.5,7.7) 80(4,7.7) 81(3.5,7.7) 82(3,7.7) 83(2.5,7.7) 84(2,7.7) 85(1.5,7.7) 86(1,7.7) 87(0.5,7.7) 88(0,7.7) 89(-0.5,7.7) 90(-1,7.7) 91(-1.5,7.7) 92(-2,7.7) 93(-2.5,7.7) 94(-3,7.7) 95(-3.5,7.7) 96(-4,7.7) 97(-4.5,7.7) 98(-5,7.7) 99(-5.5,7.7) 100(-6,7.7)
  silkscreen extent -7.82,-6.6 6.6,6.83, body extent -7,-7 7,7, height 1.6
B3F-31XX [mil]
  oct 70x70 hole 40: 1(-89,-49) 2(89,-49)
  round 100 hole 59: 3(-138,49) 4(138,49)
  silkscreen extent -145,-165 145,10, body extent -165,-200 165,109, height 303
BLM18PG121SN1D [mm] "Chip Inductor, 2-Leads, Body 1.0x0.5mm, IPC Medium Density"
  rect 0.8x0.6 smd: 1(-0.6,0) 2(0.6,0)
  body extent -0.52,-0.28 0.53,0.27, height 0.6
C12,5-5 [mil]
  round 100 hole 40: 1(-98.43,0) 2(98.43,0)
  silkscreen extent -252,-252 252,252, body extent -252,-252 252,252, height 787
C0402 [mil]
  rrect40% 22x24 smd: 1(-18.7,0) 2(19,0)
  body extent -20,-10 20,10, height 20
C0603 [mm]
  rrect40% 0.74x1 smd: 1(-0.68,0) 2(0.68,0)
  body extent -0.8,-0.4 0.8,0.4, height 0.8
C0805 [mil]
  rrect50% 52x60 smd: 1(-37.4,0) 2(38,0)
  body extent -40,-30 40,30, height 35
C1206 [mm]
  rect 1.1x1.7 smd: 1(-1.325,0) 2(1.325,0)
  silkscreen extent -0.4,-0.75 0.4,0.75, body extent -1.68,-0.87 1.67,0.88, height 1.6
DO-214AB [mil]
  rect 63x126 smd: A(119,0) C(-118.11,0)
  silkscreen extent -138,-128 138,128, body extent -140,-130 140,130, height 98
DRV8825PWPR [mm] "PowerPAD (HTSSOP) - PWP"
  oval 1.7x0.35 smd: 1(-2.85,4.225) 2(-2.85,3.575) 3(-2.85,2.925) 4(-2.85,2.275) 5(-2.85,1.625) 6(-2.85,0.975) 7(-2.85,0.325) 8(-2.85,-0.325) 9(-2.85,-0.975) 10(-2.85,-1.625) 11(-2.85,-2.275) 12(-2.85,-2.925) 13(-2.85,-3.575) 14(-2.85,-4.225) 15(2.85,-4.225) 16(2.85,-3.575) 17(2.85,-2.925) 18(2.85,-2.275) 19(2.85,-1.625) 20(2.85,-0.975) 21(2.85,-0.325) 22(2.85,0.325) 23(2.85,0.975) 24(2.85,1.625) 25(2.85,2.275) 26(2.85,2.925) 27(2.85,3.575) 28(2.85,4.225)
  rect 3.1x5.22 smd: 29(0,0)
  silkscreen extent -2.97,-4.9 1.6,5.07, body extent -2.25,-4.9 2.25,4.9, height 1.2
EEE-1VA101XP [mm] "Panasonic VS D EEE-1VA101XP"
  rect 3.4x1.4 smd: 1(2.6,0) 2(-2.6,0)
  silkscreen extent -3,-3.2 3,3.2, body extent -3.5,-3.3 3.5,3.3, height 5.4
FIDUCIAL-1X2 [mil]
  rrect100% 40x40 smd paste-3897.64 mask+20: 1(0,0)
  body extent -20,-20 20,20, height 1
FTSH-105-XX-X-DV [mm] "1.27mm pitch, 10 pin, terminal strip; vertical, SMT"
  rect 0.75x2.8 smd mask+0: 1(2.54,2.03) 2(2.54,-2.03) 3(1.27,2.03) 4(1.27,-2.03) 5(0,2.03) 6(0,-2.03) 7(-1.27,2.03) 8(-1.27,-2.03) 9(-2.54,2.03) 10(-2.54,-2.03)
  silkscreen extent 3.27,3.03 3.52,3.27
HDR2X5 [mm] "Connector; Header; 5x2 Position"
  rect 1.5x1.5 hole 0.9: 1(0,0)
  round 1.5 hole 0.9: 2(0,2.54) 3(2.54,0) 4(2.54,2.54) 5(5.08,0) 6(5.08,2.54) 7(7.62,0) 8(7.62,2.54) 9(10.16,0) 10(10.16,2.54)
  silkscreen extent -1.27,-1.27 11.43,3.81
L1806 [mm] "Chip Inductor, 2-Leads, Body 4.50x1.60mm, IPC Medium Density"
  rect 1.38x1.8 smd: 1(-2.06,0) 2(2.06,0)
  silkscreen extent -1,-0.8 1,0.8, body extent -2.35,-0.9 2.35,0.9, height 1.8
LED2012120 [mil]
  rect 48x48 smd: A(-41.34,0) C(42,0)
  silkscreen extent 0,-27 12,27, body extent -50,-25 50,25, height 28
MSTBV4 [mil]
  oval 82.5x165 hole 55: 1(-300,0) 2(-100,0) 3(100,0) 4(300,0)
  silkscreen extent -425,-150 425,180, body extent -428,-153 428,183, height 472
NCV8402AD-SOIC8 [mil]
  rect 24x60 smd: 1(-75,-108.27) 2(-25,-108.27) 3(25,-108.27) 4(75,-108.27) 5(25,109) 5(75,109) 7(-75,109) 7(-25,109)
  silkscreen extent -122,-75 95,75, body extent -98,-130 99,130, height 58
PN61729 [mil]
  round 54 hole 38: 1(50,186) 2(-49.21,186) 3(-49.21,107) 4(50,107)
  round 130.5 hole 87: P$1(-236.22,0) P$2(237,0)
  body extent -237,-405 238,226, height 406
PSMN7R0-60YS [mm]
  rect 1.8x0.6 smd: 1(-2.6,1.905) 2(-2.6,0.635) 3(-2.6,-0.635) 4(-2.6,-1.905)
  rect 4.8x4.5 smd: 5(1.14,0)
  silkscreen extent -2.72,2.63 -2.47,2.88, body extent -1.85,-2.5 2.25,2.5, height 1.2
R0402 [mil]
  rrect40% 22x24 smd: 1(-18.9,0) 2(19,0)
  body extent -20,-10 20,10, height 14
R0603 [mm]
  rrect40% 0.74x1 smd: 1(-0.68,0) 2(0.68,0)
  body extent -0.8,-0.4 0.8,0.4, height 0.8
"RGY  (S-PVQFN-N14)" [mm] "QFN, 16-Leads, Body 3.50x3.50mm, Pitch 0.50mm, Thermal Pad 2.00x2.00mm, IPC Medium Density"
  oval 0.8x0.2 smd: 1(-1.75,0.5) 7(1.75,0.5) 8(1.75,-0.5) 14(-1.75,-0.5)
  oval 0.2x0.8 smd: 2(-1,1.75) 3(-0.5,1.75) 4(0,1.75) 5(0.5,1.75) 6(1,1.75) 9(1,-1.75) 10(0.5,-1.75) 11(0,-1.75) 12(-0.5,-1.75) 13(-1,-1.75)
  rect 2x2 smd: 15(0,0)
  silkscreen extent -2.75,-1.97 1.97,1.97, body extent -1.83,-1.83 1.83,1.83, height 1
SMA-SM [mil]
  rect 79x79 smd: A(79,0) C(-78.74,0)
  silkscreen extent -89,-49 89,50, body extent -105,-54 105,55, height 116
SOD323-R [mil]
  rect 24x24 smd: A(44,0) C(-43.31,0)
  body extent -50,-31 50,31, height 28
SOD523 [mil]
  rect 28x20 smd: A(27.56,0) C(-27.56,0)
  body extent -30,-16 30,16, height 28
SOT95P230X110-3N [mm]
  rect 1.4x0.6 smd: 1(-0.95,0.95) 2(-0.95,-0.95) 3(0.95,0)
  silkscreen extent -1.07,-1.5 0.7,1.93, body extent -0.7,-1.5 0.7,1.5, height 1.1
SOT230P700X190-4N [mm] "SOT223, 4-Leads, Body 6.50x7.00mm (avg), Pitch 2.30mm, IPC Medium Density"
  rect 2.4x1 smd: 1(-2.9,2.3) 2(-2.9,0) 3(-2.9,-2.3)
  rect 2.4x3.25 smd: 4(2.9,0)
  silkscreen extent -3.02,-3.35 1.4,3.48, body extent -1.85,-3.35 1.85,3.35, height 1.9
TP-2 [mil]
  round 50 smd: 1(0,0)
VSSOP10 [mm]
  rect 1.02x0.3 smd mask+0.102: 1(-2.4,1) 2(-2.4,0.5) 3(-2.4,0) 4(-2.4,-0.5) 5(-2.4,-1) 6(2.4,-1) 7(2.4,-0.5) 8(2.4,0) 9(2.4,0.5) 10(2.4,1)
  rect 1.73x1.9 smd: 11(0,0)
  silkscreen extent -2.02,-1.7 0.65,1.82, body extent -1.55,-1.7 1.55,1.7, height 1.09
Wave_hole_3x7-singleSided#1 [mil]
  round 0 hole 118.11 unplated paste+0 mask-112: 0(0,0)
  round 0 hole 15 paste-20 mask-20: 1(-100,0) 1(-70,-70) 1(-70,70) 1(0,-100) 1(0,100) 1(70,-70) 1(70,70) 1(100,0)
  round 60 smd paste-5 mask+0: 1(-94.49,-39.37) 1(-94.49,39.37) 1(-39.37,-94.49) 1(-39.37,94.49) 1(39.37,-94.49) 1(39.37,94.49) 1(94.49,-39.37) 1(94.49,39.37)
  Top Layer circle w64.96: c0,0 r105
  Bottom Layer lines w64.96: -74.25,74.25 cw(c0,0) 105,0 cw(c0,0) 74.25,-74.25 cw(c0,0) -74.25,74.25
  body extent -105,-105 105,105
Wave_hole_3x7-singleSided#2 [mil]
  round 0 hole 118.11 unplated paste+0 mask-112: 0(0,0)
  round 0 hole 15 paste-20 mask-20: 1(-100,0) 1(-70,-70) 1(-70,70) 1(0,-100) 1(0,100) 1(70,-70) 1(70,70) 1(100,0)
  round 60 smd paste-5 mask+0: 1(-94.49,-39.37) 1(-94.49,39.37) 1(-39.37,-94.49) 1(-39.37,94.49) 1(39.37,-94.49) 1(39.37,94.49) 1(94.49,-39.37) 1(94.49,39.37)
  Top Layer circle w64.96: c0,0 r105
  Bottom Layer lines w64.96: -74.25,-74.25 cw(c0,0) 74.25,74.25 cw(c0,0) 105,0 cw(c0,0) 0,-105 cw(c0,0) -74.25,-74.25
  body extent -105,-105 105,105
XAL50xx-153 [mm] "Precision Wire Wound Inductor, 2-Leads, Body 5.28x5.48mm, IPC High Density"
  rect 1.18x4.25 smd: 1(-1.655,0) 2(1.655,0)
  silkscreen extent -2.75,-2.85 2.75,2.85, body extent -2.74,-2.84 2.74,2.84, height 4.25

## Part data
C1_ES1 C1_ES2 C1_ES3 C2_ES1 C2_ES2 C2_ES3 C5_M1 C5_M2 C5_M3 C19 C61: library part GRM155R60J474KE19D, "0.47uF 6.3v C0402 - GRM155R60J474KE19D"
C3_M1 C3_M2 C3_M3 C28 C30 C67 C68 C69 C70: library part C0603C104K5RACTU, "CAP CER 0603 100nF 50V 10% X7R"
C4_M1 C4_M2 C4_M3 C18: library part GRM155R71H103JA88D, "CAP CER 10000PF 50V X7R 0402"
C6_M1 C6_M2 C6_M3 C10_M1 C10_M2 C10_M3 C11_M1 C11_M2 C11_M3 C20 C24 C25 C57 C58 C59 C60 C62 C63_U_TR1 C63_U_TR2 C63_U_TR3 C63_U_TR4: library part GRM155R71C104KA88D, "CAP CER 0402 100nF 16V 10% X7R"
C7_M1 C7_M2 C7_M3 C8_M1 C8_M2 C8_M3 C9_M1 C9_M2 C9_M3 C12_M1 C12_M2 C12_M3 C21 C22 C23 C26: library part CC0603ZRY5V6BB105, "CAP CER 0603 1uF 10V Y5V"
C13 C14 C40 C41 C42 C43 C44 C45 C46 C48 C49 C50 C51 C52 C53 C54 C55 C56: library part GRM155R71C104KA88D, "CAP CER 0.1UF (100nF) 16V 10% X7R 0402"
C15 C16 C34: library part C1608JB0J106K080AB, "CAP CER 10UF 6.3V 10% JB 0603"
C17: library part "Cap Semi", "Capacitor (Semiconductor SIM Model)"
C27: library part C1206C475K5PACTU, "CAP CER 1206 4.7uF 50V 10% X5R"
C29: library part GRM21BR71H105KA12L, "CAP CER 0805 1uF 50V 10% X7R"
C31: library part C0805C106K8PACTU, "CAP CER 0805 10uF 10V 10% X5R"
C32: library part GRM155R60J105KE19D, "CAP CER 0402 1uF 6.3V 10% X5R"
C33 C64 C65: "CAP ALUM 100UF 35V 20% SMD"
C36 C37: library part CL05C100JB5NNNC, "CAP CER 10PF 50V 5% NP0 0402"
C38: library part 04025A220JAT2A, "CAP CER 0402 22pF 50V 5% C0G"
C66: library part UPW1H471MHD1TO, "CAP ALU 470uF 50V 20%"
D5 D6 D8 D9: "LED 0805 Yellow"
D7 D10 D15: library part SK310A, "DIODE Schottky 3A SMA"
D17: "DIODE DO-214AB"
D18: "Z-Diode"
D19 D25: "DIODE Schottky 3A SMA"
D22: "DIODE TVS"
D23_U_TR1 D23_U_TR2 D23_U_TR3 D23_U_TR4 D24_U_TR1 D24_U_TR2 D24_U_TR3 D24_U_TR4: "DIODE SOD523"
DA1_ES1 DA1_ES2 DA1_ES3 DA2: "PESDxL2BT TVS Diode Array 2x"
EXP1 EXP2: "Header, 5-Pin, Dual row"
F1 F2 F3: "FUSE PTH ATO"
FB5 FB6: "FERRITE BEAD 1806 60ohm"
JTAG/DEBUG1: library part "ARM Cortex JTAG-DEBUG Header"
L1: "IND 15uH 3.9A 20%"
LED1: "LED 0805 Green"
M1_M1 M1_M2 M1_M3 M2 M3: library part "Molex 0705430003 Alt", "Molex 4 Pin Clip Connector"
MAX1_ES1 MAX1_ES2 MAX1_ES3 MIN1_ES1 MIN1_ES2 MIN1_ES3: library part "Molex Endstop"
Q3 Q4: "N-Channel MOSFET"
R1_ES1 R1_ES2 R1_ES3 R2_ES1 R2_ES2 R2_ES3: library part ERJ-2GEJ272X, "RES SMD 2.7K OHM 5% 1/10W 0402"
R3_M1 R3_M2 R3_M3 R19 R42: library part ERJ2GEJ105X, "RES 0402 1M 100mW 5%"
R4_M1 R4_M2 R4_M3 R20: library part ERJ-2RKF2701X, "RES SMD 2.7K OHM 1% 1/10W 0402"
R5_M1 R5_M2 R5_M3 R6_M1 R6_M2 R6_M3 R21 R22: library part CSRN2512FTR100, "RES SMD 0.1 OHM 1% 2W 2512"
R7 R10 R13 R16: library part RC0603JR-071K8L, "RES 0603 1.8K 100mW 5%"
R8 R11 R14 R17: library part CRCW060310R0FKEA, "RES 0603 10r 100mW 1%"
R9 R12 R15 R18: library part RC1005F104CS, "RES SMD 100K OHM 1% 1/16W 0402"
R23: library part CRCW0402200KFKED, "RES 0402 22r 63mW 1%"
R25 R27 R28 R29 R34 R41: library part ERJ-3EKF1002V, "RES 0603 10K 100mW 1%"
R26: library part RL2512FK-070R06L, "RES 0.06 OHM 1W 1% 2512 SMD"
R30: library part ERJ-3EKF1001V, "RES 0603 1K 100mW 1%"
R31 R32: library part ERJ-2RKF39R0X, "RES SMD 39 OHM 1% 1/10W 0402"
R35: library part CRCW04026K80FKED, "RES SMD 6.8K OHM 1% 1/16W 0402"
R37 R38 R39 R40: library part RC1608F240CS, "RES SMD 24 OHM 1% 1/10W 0603"
R43_U_TR1 R43_U_TR2 R43_U_TR3 R43_U_TR4 R44_U_TR1 R44_U_TR2 R44_U_TR3 R44_U_TR4: library part ERJ3EKF4701V, "RES 0603 4.7K 100mW 1%"
S1: library part 1571610-2_1, "SWTCH Momentary Washable"
T1 T2: library part con-phoenix-508_4
TP1_ES1 TP1_ES2 TP1_ES3 TP2_ES1 TP2_ES2 TP2_ES3 TP3_M1 TP3_M2 TP3_M3 TP4_M1 TP4_M2 TP4_M3 TP5_M1 TP5_M2 TP5_M3 TP6_M1 TP6_M2 TP6_M3 TP7_M1 TP7_M2 TP7_M3 TP8_M1 TP8_M2 TP8_M3 TP9_M1 TP9_M2 TP9_M3 TP10 TP11 TP12 TP13 TP14 TP15 TP16 TP17 TP18 TP19 TP20 TP21 TP22 TP24_M1 TP24_M2 TP24_M3 TP25 TP26_U_TR1 TP26_U_TR2 TP26_U_TR3 TP26_U_TR4: library part Socket, "Socket"
U1_M1 U1_M2 U1_M3 U3: "DRV8825 Ti Stepper Driver"
U2: "TXS0104E - Bidriectional Opendrain/pushpull level shift"
U4: library part LM25011, "REG BUCK"
U6: library part ATML-ATSAM3X8CA-AU-LQFP-100, "Atmel ARM Cortex M3 MCU ATSAM3X8CA-AU"
U7: "ADI iCoupler - USB 2.0 Galvanic Isolator"
USB: "USB connector B PTH"
X1: library part XTAL, "Crystal Oscillator"

## Via types
v1: diameter 25, hole 15, Top Layer to Bottom Layer, 243 vias
v2: diameter 30, hole 15, Top Layer to Bottom Layer, tented both sides, 72 vias
v3: diameter 19.68, hole 7.87, Top Layer to Bottom Layer, 64 vias
v4: diameter 25, hole 15, Top Layer to Bottom Layer, tented both sides, 51 vias
v5: diameter 30, hole 15, Top Layer to Bottom Layer, tented bottom, 32 vias
v6: diameter 30, hole 15, Top Layer to Bottom Layer, 10 vias
v7: diameter 50, hole 30, Top Layer to Bottom Layer, 2 vias